# EAGLE board MiniMoto (EAGLE 6.4)
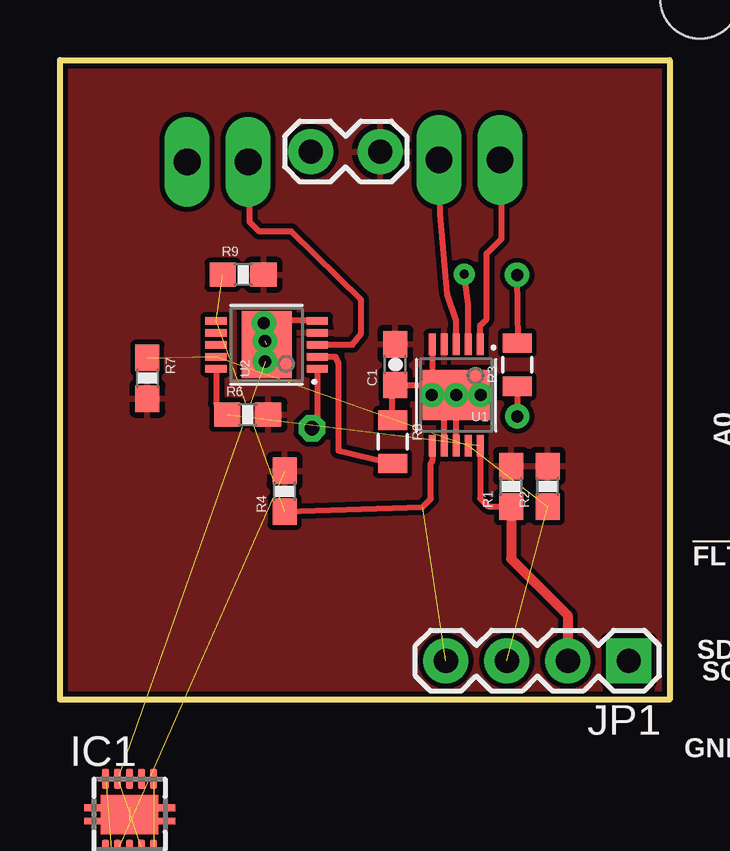
[diagram p0: board, top side]
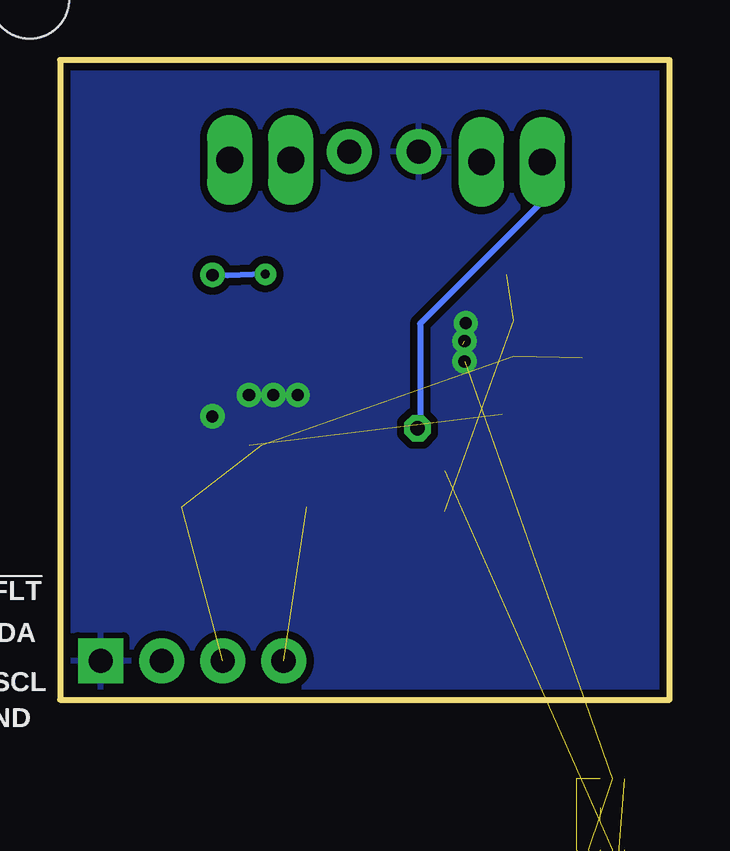
[diagram p1: board, bottom side, seen from below]

Size 25.4 x 26.67 mm. Coordinates in mm from the lower left corner, seen from the top.
Outline: 0,0 0,26.67 25.4,26.67 25.4,0 0,0
Copper layers (1*16): Top 0.035mm / dielectric 1.5mm / Bottom 0.035mm
Design rules "Sparkfun": minimum track width 8mil, minimum drill 20mil, track to track 8mil, track to pad 8mil, pad to pad 8mil, via to via 8mil, smd to smd 8mil, copper to edge 8mil, drill to drill 8mil, minimum pad ring 12mil, minimum via ring 10mil, stop-mask expansion 4mil, vias tented up to drill 20mil, thermal gap 10mil
tRestrict: area 23.6,26.2 to 29.7,32.3; area 27.4,21.1 to 33.5,27.2; area 31.2,2 to 37.3,8.1

## Footprints (pad centres in the part's own frame; a part is rotated, then mirrored left to right if it is on the bottom)
VLF4012A = smd 0.9 x 1.3: P$1 -1.9,0; P$2 1.9,0
0603-CAP = smd 1.1 x 1: 1 -0.85,0; 2 0.85,0
EIA3216 = smd 1.4 x 1.6: A 1.4,0; C -1.4,0
S-PDSO-N10 = smd 0.28 x 0.85: 1 -1,-1.475; 2 -0.5,-1.475; 3 0,-1.475; 4 0.5,-1.475; 5 1,-1.475; 6 1,1.475; 7 0.5,1.475; 8 0,1.475; 9 -0.5,1.475; 10 -1,1.475 | smd 2.4 x 1.65: PP 0,0 | smd 3.8 x 0.28: PP@1 0,0.275; PP@2 0,-0.275
1X02_LONGPADS = drill 1.118 pad 1.88 long: 1 0,0; 2 2.54,0
1X04 = drill 1.016 pad 1.88 square: 1 0,0 | drill 1.016 pad 1.88: 2 2.54,0; 3 5.08,0; 4 7.62,0
1X02_LOCK = drill 1.016 pad 1.88: 1 -0.178,0; 2 2.718,0
0603-RES = smd 1.1 x 1: 1 -0.85,0; 2 0.85,0
0805 = smd 0.8 x 1.2: 1 -0.9,0; 2 0.9,0
M0805 = smd 1.3 x 1.6: 1 -0.95,0; 2 0.95,0
STAND-OFF = hole 3.302: 0,0
MSOP-10-GNDPAD = smd 0.305 x 0.889: 1 -1,-2.11; 2 -0.5,-2.11; 3 0,-2.11; 4 0.5,-2.11; 5 1,-2.11; 6 1,2.11; 7 0.5,2.11; 8 0,2.11; 9 -0.5,2.11; 10 -1,2.11 | smd 2.794 x 2.083: GND 0,0

## Placement (x,y rotation side)
2.2UH  VLF4012A  [VLF4012A]  2.35,-10.73 0 top  (outside the outline)
C1  0.1uF  [0603-CAP]  13.97,13.97 90 top
C2  [EIA3216]  2.95,-22.08 0 top  (outside the outline)
C3  [EIA3216]  2.95,-25.33 0 top  (outside the outline)
C4  0.1uF  [0603-CAP]  1.4,-27.98 0 top  (outside the outline)
IC1  TPS61200  [S-PDSO-N10]  2.9,-4.78 0 top  (outside the outline)
J1  M02PTH3  [1X02_LONGPADS]  5.3,22.42 0 top
J5  M02PTH3  [1X02_LONGPADS]  15.79,22.5 180 bottom
JP1  [1X04]  23.7,1.62 180 top
JP3  [1X02_LOCK]  10.63,22.85 0 top
LOGO2  OSHW-LOGOS  [OSHW-LOGO-S]  21.61,30.82 0 top  (outside the outline)
R1  1K  [0603-RES]  18.8,8.89 90 top
R2  1K  [0603-RES]  20.32,8.89 90 top
R3  0.22  [0805]  19.05,13.97 90 top
R4  10K  [0603-RES]  9.36,8.69 90 top
R5  [M0805]  1.9,-15.38 0 top  (outside the outline)
R6  1K  [0603-RES]  7.82,11.88 0 top
R7  1K  [0603-RES]  3.64,13.4 270 top
R8  0.22  [0805]  13.86,10.75 270 top
R9  10K  [0603-RES]  7.63,17.72 0 top
R10  [M0805]  1.9,-19.13 0 top  (outside the outline)
STANDOFF1  STAND-OFF  [STAND-OFF]  26.67,29.21 0 top
STANDOFF2  STAND-OFF  [STAND-OFF]  30.48,24.13 0 top  (outside the outline)
STANDOFF3  STAND-OFF  [STAND-OFF]  34.29,5.08 0 top  (outside the outline)
U1  DRV8830  [MSOP-10-GNDPAD]  16.51,12.7 180 top
U2  DRV8830  [MSOP-10-GNDPAD]  8.61,14.8 90 top

## Library data of the parts
2.2UH = PEBBLE
C1 C4 = SparkFun-Capacitors; PROD_ID: CAP-00810
C2 C3 JP1 JP3 = SparkFun
IC1 = texas; MPN: TPS61200DRCT; OC_FARNELL: 1471238; OC_NEWARK: 37M0066
J1 J5 = SparkFun-Connectors
LOGO2 = SparkFun-Aesthetics
R1 R2 R6 R7 = SparkFun-Resistors; PROD_ID: RES-07856
R3 R8 = SparkFun-Resistors; PROD_ID: RES-09883
R4 R9 = SparkFun-Resistors; PROD_ID: RES-00824
R5 R10 = resistor
STANDOFF1-STANDOFF3 = SparkFun-Electromechanical
U1 U2 = SparkFun-PowerIC

## Nets
!FAULT: JP1.4 R4.1 R9.1 U1.6 U2.6
BAT+: 2.2UH.P$1 C2.A IC1.5 IC1.6 IC1.7 IC1.8
GND: C1.1 C2.C C3.C C4.1 IC1.4 IC1.9 JP1.1 JP3.1 R3.1 R5.1 R8.1 U1.5 U1.7 U1.8 U1.GND U2.5 U2.GND
N$2: R8.2 U2.2
N$3: R3.2 U1.2
N$5: 2.2UH.P$2 IC1.3
N$7: IC1.10 R5.2 R10.1
N$9: C4.2 IC1.1
OUT1: J5.1 U1.3
OUT2: J5.2 U1.1
OUT3: J1.2 U2.3
OUT4: J1.1 U2.1
PP: IC1.PP IC1.PP@1 IC1.PP@2
SCL: JP1.2 R1.1 R6.1 U1.10 U2.10
SDA: JP1.3 R2.1 R7.1 U1.9 U2.9
VCC: C1.2 C3.A IC1.2 JP3.2 R1.2 R2.2 R4.2 R6.2 R7.2 R9.2 R10.2 U1.4 U2.4

## Tracks (layer width: path | path; a pad name or v marks a point on that pad's centre or on a via)
!FAULT  (3 unrouted)
  Top 0.254: U1.6 15.51,9.92 15.45,9.86 15.45,8.37 15.12,8.04 R4.1
BAT+  (5 unrouted)
GND  (via drill 0.51)  (7 unrouted)
  Top 0.254: 15.07,13.12 C1.1 13.83,12.98 R8.1 | 15.07,13.12 v15.49,12.7 | U1.5 15.51,13.56 15.07,13.12 | R3.1 v19.05,11.81 | U2.5 8.59,15.8 v8.49,15.7 | U1.7 16.01,12.16 16,12.17 16,12.19 U1.GND U1.8
  other vias: 16.51,12.7 17.53,12.7 8.54,14.95 8.54,14.1
  pour Bottom (isolate 0.305): 0,26.67 25.4,26.67 25.4,0 0,0
N$2
  Top 0.254: U2.2 11.47,14.3 11.6,14.02 11.6,10.38 R8.2
N$3  (via drill 0.38, 0.51)
  Top 0.254: U1.2 17.01,16.5 v16.84,17.74 | R3.2 19.1,14.9 v19.05,17.71
  Bottom 0.254: v16.84,17.74 18.41,17.69 v19.05,17.71
N$5  (1 unrouted)
N$7  (2 unrouted)
N$9  (1 unrouted)
OUT1
  Top 0.254: U1.3 16.51,15.8 16.14,16.92 15.84,20.25 J5.1
OUT2
  Top 0.254: U1.1 17.51,15.61 17.78,15.88 17.78,18.6 18.4,19.22 18.4,22.43 J5.2
OUT3
  Top 0.254: U2.3 12.18,14.8 12.55,15.27 12.55,16.67 9.65,19.52 8.3,19.52 7.9,19.92 7.9,22.36 J1.2
OUT4  (via drill 0.6)
  Top 0.254: U2.1 10.72,11.54 v10.5,11.32
  Bottom 0.254: J1.1 5.3,20.77 10.4,15.67 10.4,11.42 v10.5,11.32
PP  (2 unrouted)
SCL  (1 unrouted)
  Top 0.254: U1.10 17.51,8.4 17.87,8.04 R1.1 | U2.10 6.5,12.35 R6.1
  Top 0.406: R1.1 18.8,5.87 21.15,3.52 JP1.2
SDA  (4 unrouted)
VCC  (3 unrouted)
  pour Top: 0,27.27 0,0.27 25,0.27 25,27.27

## Text on the board
tPlace: OUT1 | OUT2 | VCC | GND | VCC | GND | A0 | A1 | 0 | 1 | !FLT | SDA | SCL | GND
bPlace: OUT1 | OUT2 | VCC | GND | MiniMoto | VCC | GND | !FLT | SDA | SCL | GND